# Altium PCB PCB1.PcbDoc
Units mm, origin at the board's own origin, x right, y up, seen from the top; angles counter-clockwise.
Board outline 99.44 x 97.79 mm, 2 copper layers (Top Layer, Bottom Layer); 92 components, 54 nets, 232 pads, 32 vias.
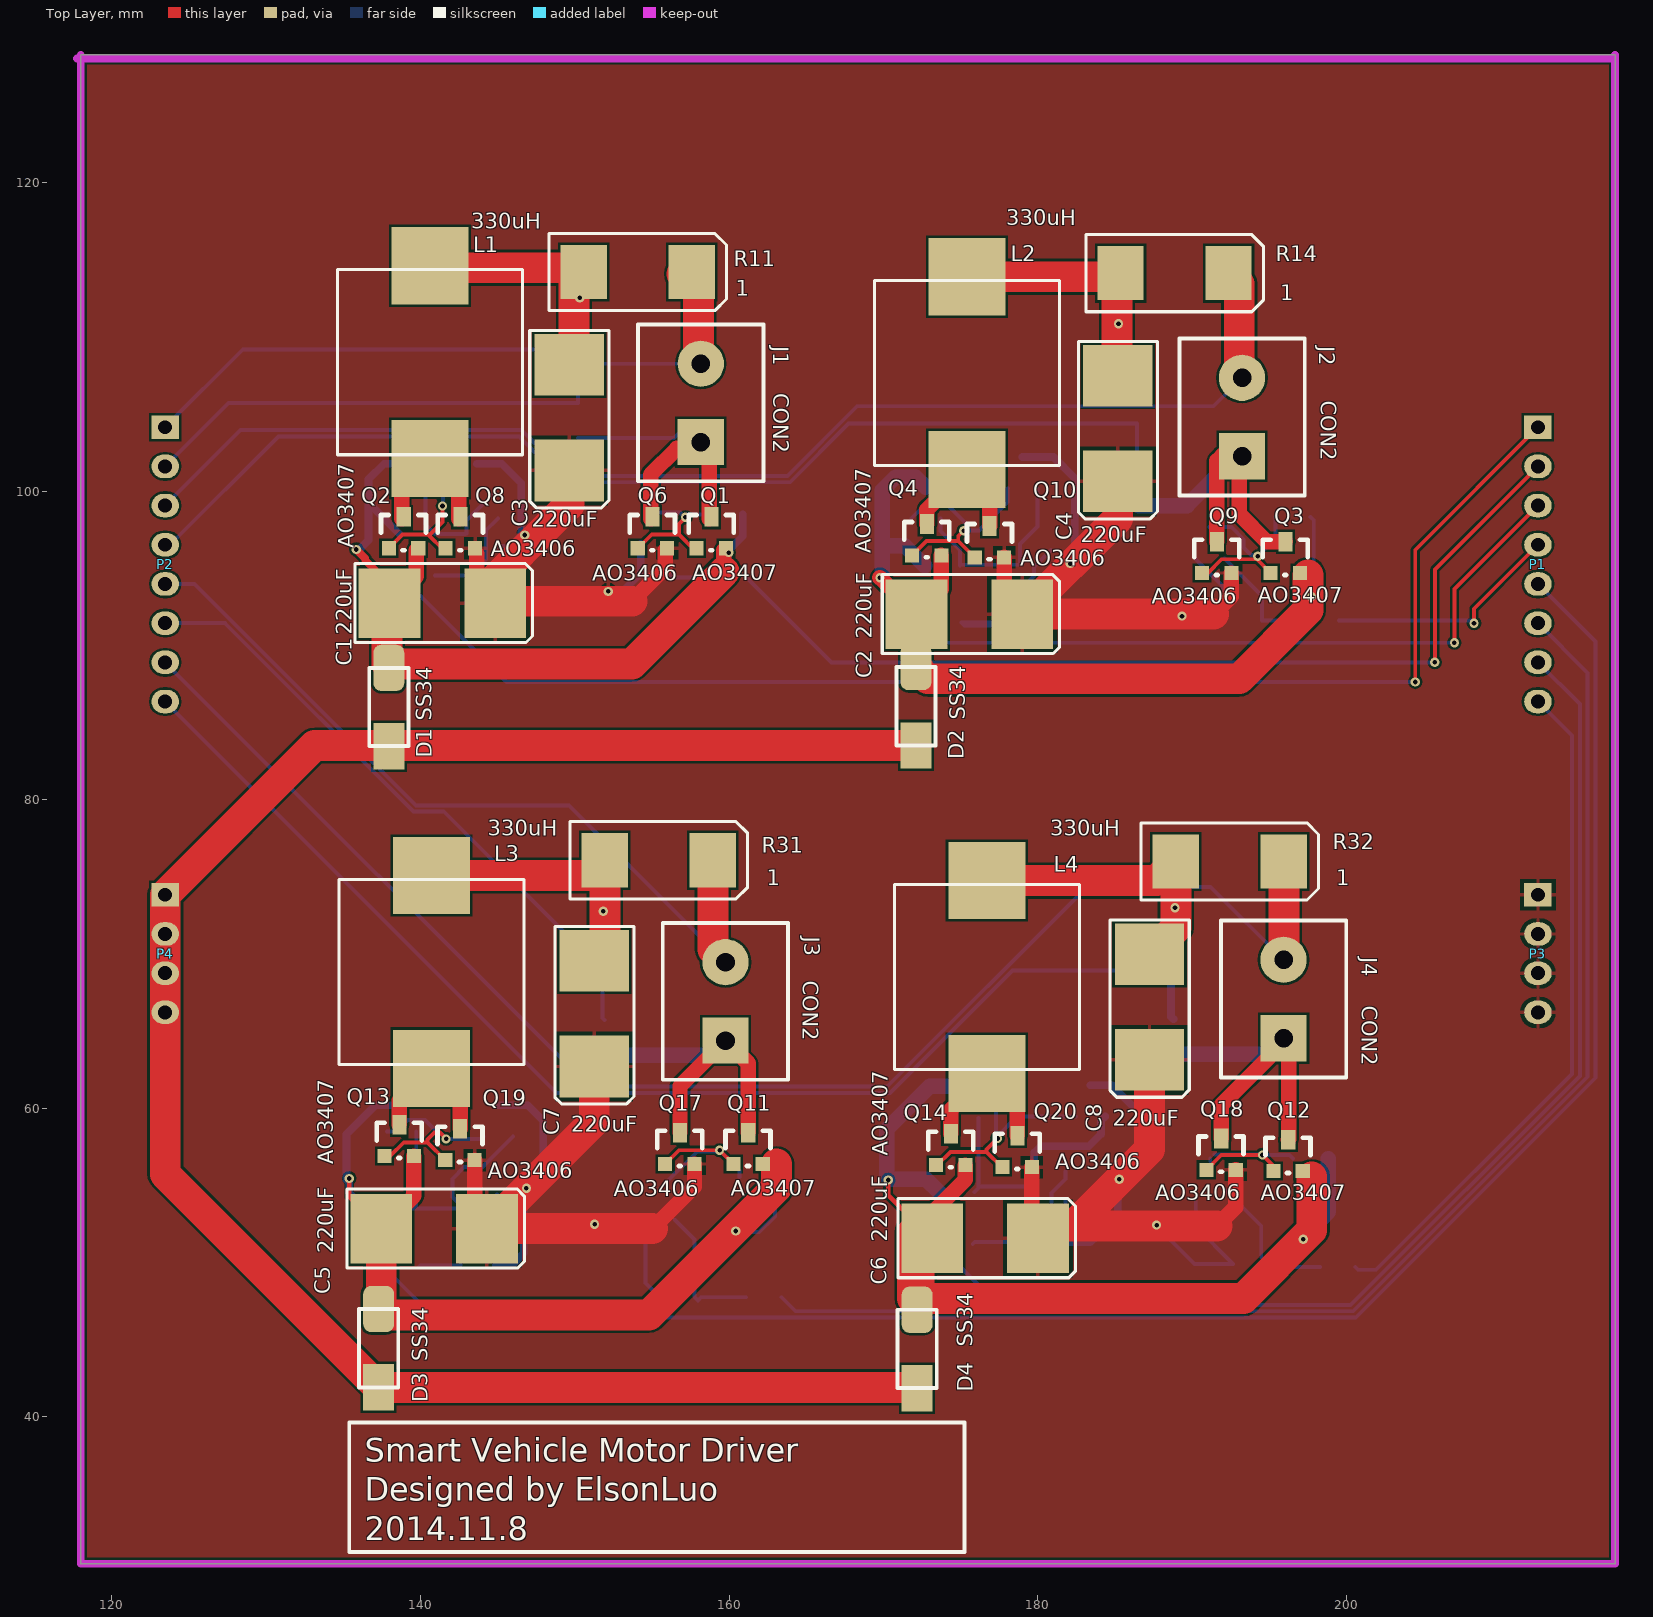
[diagram p0: Top Layer view]
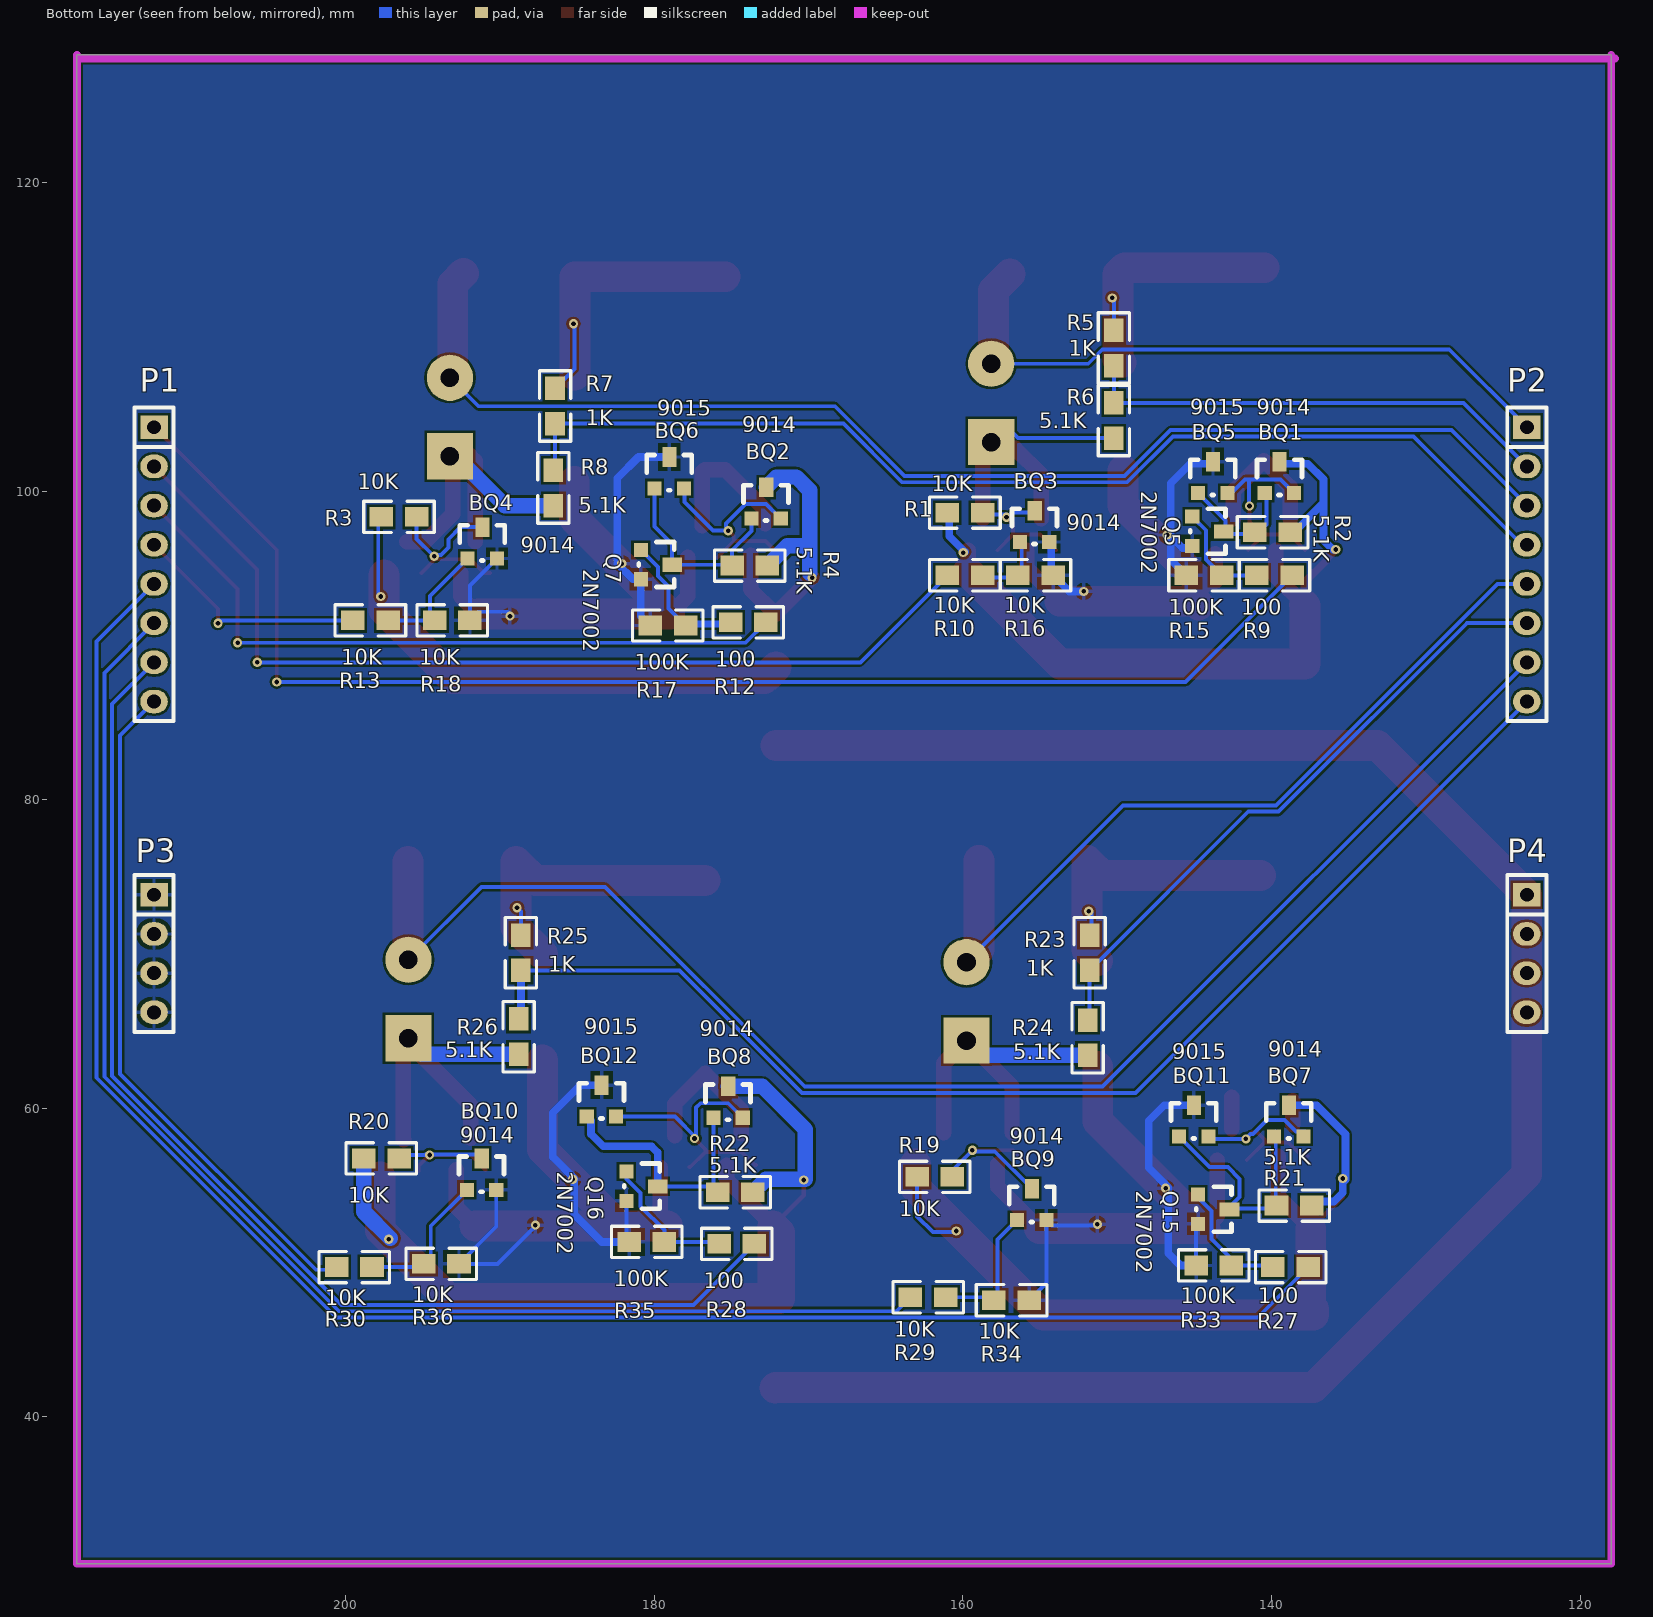
[diagram p1: Bottom Layer view, seen from below]
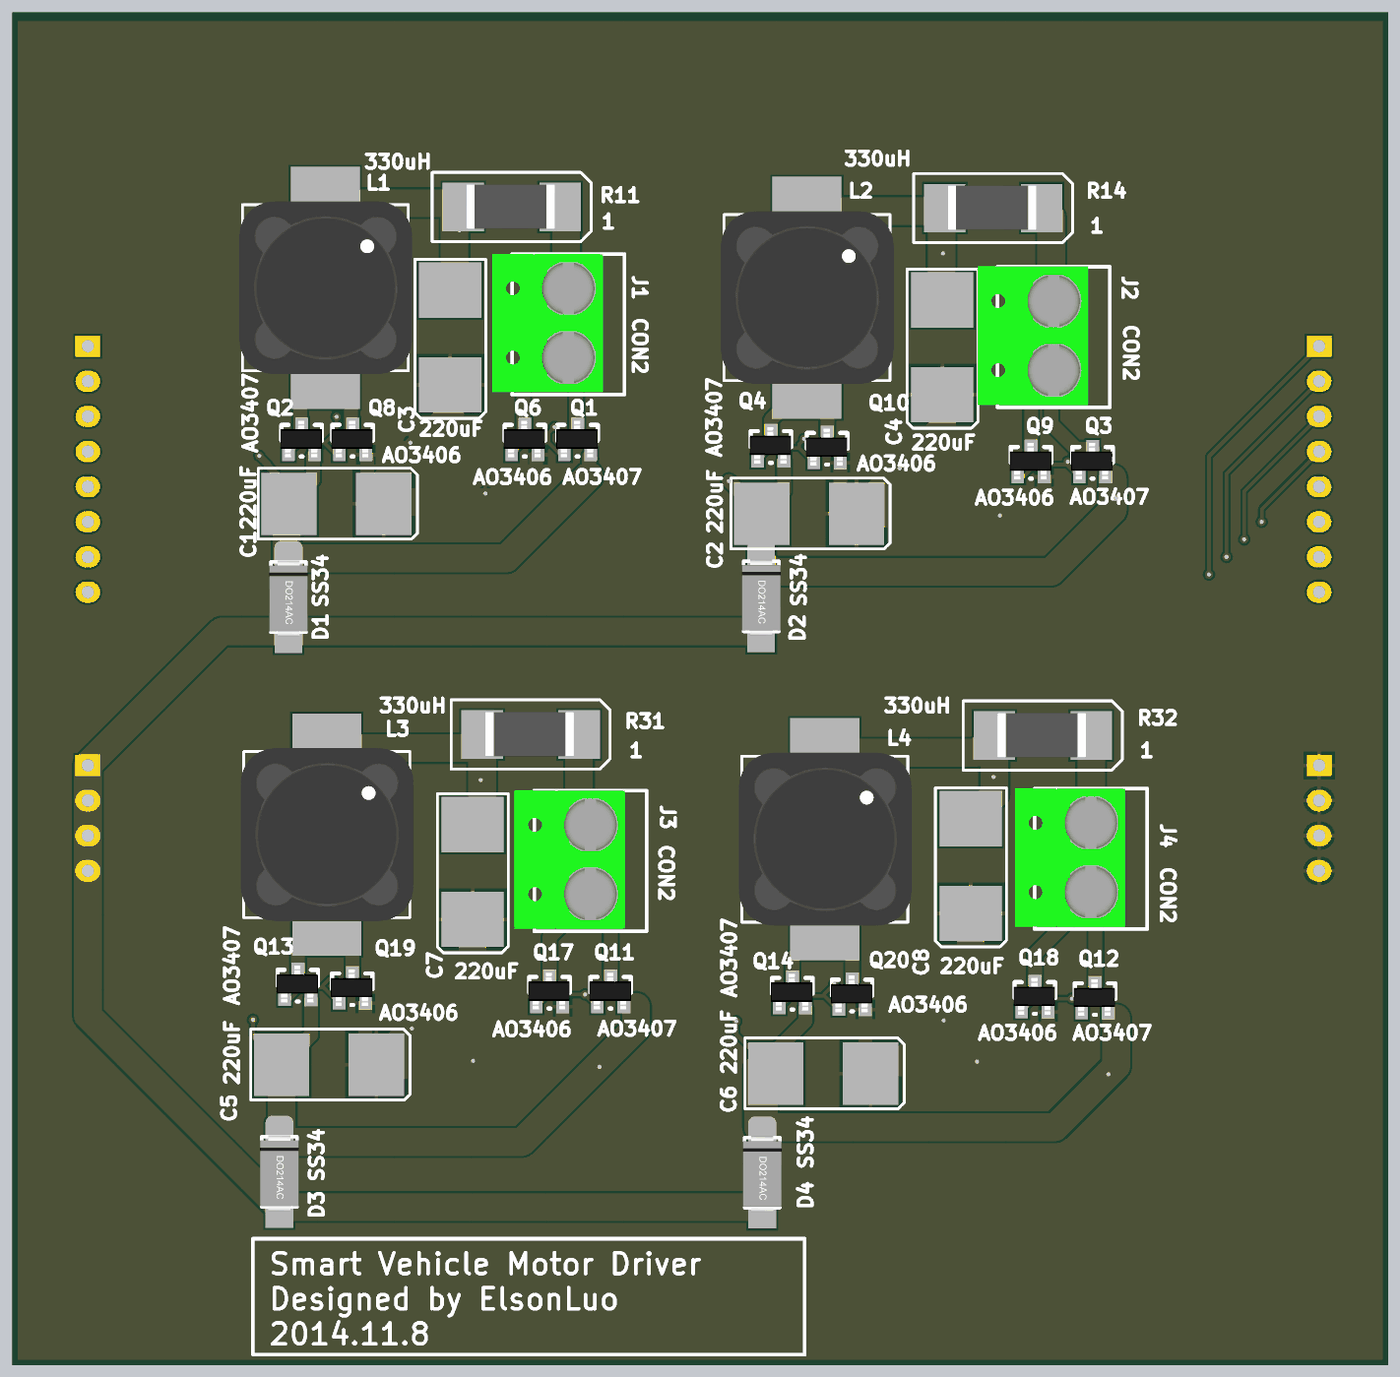
[diagram p2: 3D render of the assembled board from above, using the file's embedded part models]
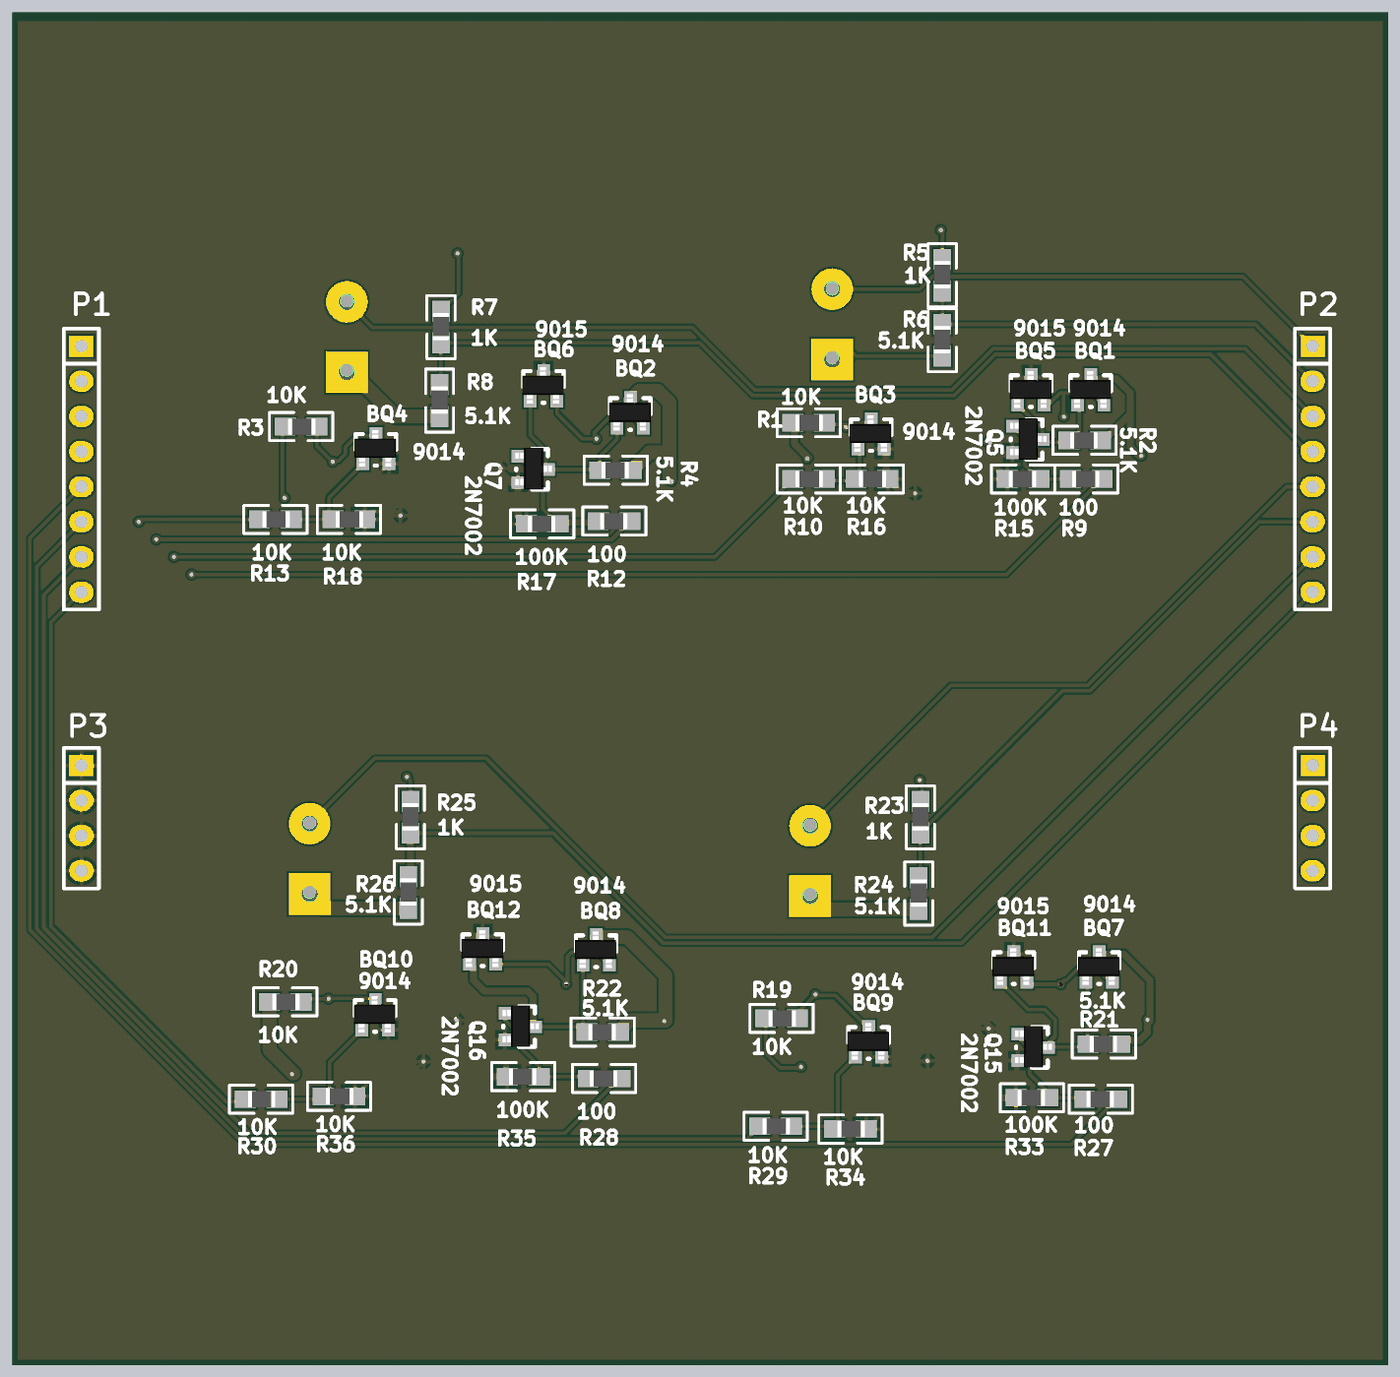
[diagram p3: 3D render of the assembled board from below, using the file's embedded part models]

## Layer stack, top to bottom
Top Solder: solder mask 0.0102, Solder Resist, Dk 3.5
Top Layer: signal copper 0.0356
Dielectric1: dielectric 0.32, FR-4, Dk 4.8
Bottom Layer: signal copper 0.0356
Bottom Solder: solder mask 0.0102, Solder Resist, Dk 3.5

## Board outline
117.983,30.48 217.424,30.48 217.424,128.27 117.983,128.27

## Design rules (kind name [scope] priority, off if disabled: settings)
Clearance [All] p1: gap=0.15
ComponentClearance [All] p1 off: gap=0.254 collisioncheckmode=3 verticalgap=0.254 showdistances=FALSE
PolygonConnect [All] p1: connectstyle=Relief reliefconductorwidth=0.254 reliefentries=4 polygonreliefangle="90 Angle" airgapwidth=0.254
RoomDefinition mcu [InComponentClass('mcu')] p1: confinementstyle=ConfineIn formatcopy=TRUE lockcomponents=FALSE outline 115.57,28.702 221.234,28.702 221.234,131.318 115.57,131.318
RoutingVias [All] p1: holewidth=0.3 width=0.6 viastyle="Through Hole" minholewidth=0.3 minwidth=0.6 maxholewidth=0.3 maxwidth=0.6
SMDNeckDown [All] p1 off: percent=80.000
SilkToSolderMaskClearance SilkscreenOverComponentPads [IsPad] p1: minsilkscreentomaskgap=0.254 clearancetoexposedcopper=TRUE
SolderMaskExpansion [All] p1: expansion=0.02
Width Width_2 [All] p1: maxlimit=2 minlimit=0.254 preferedwidth=0.254
Width Width_1 [All] p2: maxlimit=2 minlimit=0.254 preferedwidth=0.254 toplayer_maxwidth=1 minimp=50.000000 maximp=50.000000 favimp=50.000000
Width [All] p3: maxlimit=5 minlimit=0.15 preferedwidth=0.15
27 further rules are at their usual default settings.

## Components (designator, comment, footprint, x,y, rotation, side; value= is the part's Value field where it differs from the comment)
BQ1 "9014" SOT-23 139.421,101.905 r180 bottom
BQ2 "9014" SOT-23 172.695,100.254 r180 bottom
BQ3 "9014" SOT-23 155.296,98.73 r180 bottom (schematic designator BQ2)
BQ4 "9014" SOT-23 191.084,97.663 r180 bottom
BQ5 "9015" SOT-23 143.739,101.905 r180 bottom (schematic designator BQ3)
BQ6 "9015" SOT-23 178.968,102.21 r180 bottom
BQ7 "9014" SOT-23 138.811,60.198 r180 bottom
BQ8 "9014" SOT-23 175.158,61.417 r180 bottom
BQ9 "9014" SOT-23 155.473,54.788 r180 bottom
BQ10 "9014" SOT-23 191.135,56.744 r180 bottom
BQ11 "9015" SOT-23 144.983,60.198 r180 bottom
BQ12 "9015" SOT-23 183.363,61.493 r180 bottom
C1 "220uF" 7443 140.487,92.735 r0 top
C2 "220uF" 7443 174.65,92.024 r0 top
C3 "220uF" 7443 149.631,105.689 r270 top
C4 "220uF" 7443 185.191,104.978 r270 top
C5 "220uF" 7443 139.954,52.197 r0 top
C6 "220uF" 7443 175.666,51.562 r0 top
C7 "220uF" 7443 151.257,67.056 r270 top
C8 "220uF" 7443 187.249,67.488 r270 top
D1 "SS34" DO-241AC 137.947,86.004 r90 top
D2 "SS34" DO-241AC 172.11,86.055 r90 top
D3 "SS34" DO-241AC 137.287,44.45 r90 top
D4 "SS34" DO-241AC 172.187,44.399 r90 top
J1 "CON2" con2 158.166,105.715 r90 top
J2 "CON2" con2 193.243,104.8 r90 top
J3 "CON2" con2 159.766,66.929 r90 top
J4 "CON2" con2 195.936,67.081 r90 top
L1 "330uH" 12x12 140.614,108.356 r270 top
L2 "330uH" 12x12 175.412,107.645 r270 top
L3 "330uH" 12x12 140.716,68.834 r270 top
L4 "330uH" 12x12 176.708,68.504 r270 top
P1 "Header 8" "sip8 N" 212.425,104.14 r90 top
P2 "Header 8" "sip8 N" 123.45,104.14 r90 top
P3 "Header 4" "sip4 N" 212.425,70.025 r90 top
P4 "Header 4" "sip4 N" 123.45,70.025 r90 top
Q1 "AO3407" sot-23 158.902,98.323 r0 top
Q2 "AO3407" sot-23 138.963,98.323 r0 top
Q3 "AO3407" sot-23 196.113,96.723 r0 top
Q4 "AO3407" sot-23 172.872,97.866 r0 top
Q5 "2N7002" sot-23 143.104,97.333 r270 bottom (schematic designator Q3)
Q6 "AO3406" sot-23 155.092,98.323 r0 top (schematic designator Q4)
Q7 "2N7002" sot-23 178.841,95.174 r270 bottom
Q8 "AO3406" sot-23 142.646,98.323 r0 top (schematic designator Q5)
Q9 "AO3406" sot-23 191.668,96.723 r0 top
Q10 "AO3406" sot-23 176.936,97.739 r0 top
Q11 "AO3407" sot-23 161.29,58.42 r0 top
Q12 "AO3407" sot-23 196.291,57.963 r0 top
Q13 "AO3407" sot-23 138.684,58.928 r0 top
Q14 "AO3407" sot-23 174.422,58.344 r0 top
Q15 "2N7002" sot-23 142.723,53.391 r270 bottom
Q16 "2N7002" sot-23 179.781,54.889 r270 bottom
Q17 "AO3406" sot-23 156.87,58.42 r0 top
Q18 "AO3406" sot-23 191.948,58.039 r0 top
Q19 "AO3406" sot-23 142.621,58.674 r0 top
Q20 "AO3406" sot-23 178.74,58.217 r0 top
R1 "10K" 0805 158.725,98.603 r0 bottom
R2 "5.1K" 0805 141.072,97.333 r180 bottom
R3 "10K" 0805 195.402,98.323 r0 bottom
R4 "5.1K" 0805 174.955,95.174 r180 bottom
R5 "1K" 0805 150.216,110.414 r270 bottom (schematic designator R3)
R6 "5.1K" 0805 150.216,105.715 r270 bottom (schematic designator R4)
R7 "1K" 0805 186.436,106.655 r270 bottom
R8 "5.1K" 0805 186.538,101.346 r270 bottom
R9 "100" 0805 140.945,94.539 r180 bottom (schematic designator R5)
R10 "10K" 0805 158.725,94.539 r0 bottom (schematic designator R6)
R11 "1" 2512 154.076,114.198 r0 top (schematic designator R7)
R12 "100" 0805 175.057,91.491 r180 bottom
R13 "10K" 0805 197.256,91.618 r0 bottom
R14 "1" 2512 188.874,114.122 r0 top
R15 "100K" 0805 145.517,94.539 r180 bottom (schematic designator R8)
R16 "10K" 0805 154.153,94.539 r0 bottom (schematic designator R9)
R17 "100K" 0805 180.264,91.288 r180 bottom
R18 "10K" 0805 191.948,91.618 r0 bottom
R19 "10K" 0805 160.68,55.55 r0 bottom
R20 "10K" 0805 196.545,56.744 r0 bottom
R21 "5.1K" 0805 139.675,53.696 r180 bottom
R22 "5.1K" 0805 175.895,54.559 r180 bottom
R23 "1K" 0805 151.79,71.222 r270 bottom
R24 "5.1K" 0805 151.917,65.71 r270 bottom
R25 "1K" 0805 188.646,71.222 r270 bottom
R26 "5.1K" 0805 188.798,65.786 r270 bottom
R27 "100" 0805 139.903,49.708 r180 bottom
R28 "100" 0805 175.793,51.206 r180 bottom
R29 "10K" 0805 161.112,47.752 r0 bottom
R30 "10K" 0805 198.298,49.708 r0 bottom
R31 "1" 2512 155.448,76.073 r0 top
R32 "1" 2512 192.456,75.997 r0 top
R33 "100K" 0805 144.882,49.809 r180 bottom
R34 "10K" 0805 155.702,47.549 r0 bottom
R35 "100K" 0805 181.635,51.333 r180 bottom
R36 "10K" 0805 192.659,49.911 r0 bottom

## Footprints (in the part's own frame and the unit in brackets; to place one, negate y for a bottom-side part, rotate by r counter-clockwise, add the part's x,y. Pads: shape width x height; smd on the part's side, far side on the other; paste and mask are expansions set on the pad)
12x12 [mm]
  rect 5x5 smd: 1(-6.25,0) 2(6.25,0)
  silkscreen extent -6,-6 6,6, body extent -6.25,-6.22 6.25,6.28, height 6.7
0805 [mil]
  rect 60x50 smd: 1(0,0) 2(90,0)
  silkscreen extent -45,-40 135,40, body extent 4,-24 83,24, height 20
2512 [mm]
  rect 3x3.5 smd: 1(-3.5,0) 2(3.5,0)
  silkscreen extent -5.75,-2.5 5.75,2.5, body extent -3.27,-1.57 3.13,1.63, height 0.7
7443 [mm]
  rect 4x4.5 smd: 1(-2.5,0) 2(4.35,0)
  silkscreen extent -4.72,-2.55 6.78,2.58, body extent -2.52,-2.25 4.52,2.22, height 3
con2 [mm]
  rect 3x3 hole 1.2: 1(-2.54,0)
  round 3 hole 1.2: 2(2.54,0)
  silkscreen extent -5.08,-4.06 5.08,4.06, body extent -4.9,-2.5 5.1,5.5, height 11
DO-241AC [mm]
  rect 3x2 smd: 1(-2.54,0)
  rrect50% 3x2 smd: 2(2.54,0)
  silkscreen extent -2.54,-1.27 2.54,1.27, body extent -2.84,-1.4 2.64,1.4, height 2.24
"sip4 N" [mil]
  rect 60x70 hole 35.43: 1(150,0)
  oval 60x70 hole 35.43: 2(50,0) 3(-50,0) 4(-150,0)
  body extent -200,-50 200,50, height 331
"sip8 N" [mil]
  rect 60x70 hole 35.43: 1(0,0)
  oval 60x70 hole 35.43: 2(-100,0) 3(-200,0) 4(-300,0) 5(-400,0) 6(-500,0) 7(-600,0) 8(-700,0)
  body extent -750,-50 50,50, height 331
SOT-23 [mil]
  rect 36x36 smd: 1(-40,-80) 2(35,-80)
  rect 36x50 smd: 3(-2,0)
  silkscreen extent -60,-85 55,5, body extent -63,-87 55,17, height 43
sot-23 [mil]
  rect 36x36 smd: 1(-40,-80) 2(35,-80)
  rect 36x50 smd: 3(-2,0)
  silkscreen extent -60,-85 55,5, body extent -63,-87 55,17, height 43

## Part data
BQ1 BQ2 BQ3 BQ4 BQ5 BQ6 BQ7 BQ8 BQ9 BQ10 BQ11 BQ12: "transistor"
C1 C2 C3 C4 C5 C6 C7 C8: library part "Electrolytic CAP"
D1 D2 D3 D4: library part SS14, "Diode"
L1 L2 L3 L4: library part Inductance
P1 P2: "Header, 8-Pin"
P3 P4: "Header, 4-Pin"
R1 R2 R3 R4 R5 R6 R7 R8 R9 R10 R11 R12 R13 R14 R15 R16 R17 R18 R19 R20 R21 R22 R23 R24 R25 R26 R27 R28 R29 R30 R31 R32 R33 R34 R35 R36: library part RES, "RES"

## Via types
v1: diameter 0.6, hole 0.3, Top Layer to Bottom Layer, tented both sides, 32 vias

## Nets (pads, with @x,y where several pads share a name; then routed paths per layer and width w, separated by ;. In a path a pad name is that pad's centre, name@x,y a point inside that pad or via, vN(x,y) a via of type N, cw(c..) or ccw(c..) an arc to the next point about the centre after c; other vN are vias at no path point)
GND: BQ3.2 BQ4.2 BQ5.3 BQ6.3 BQ9.2 BQ10.2 BQ11.3 BQ12.3 C1.2 C2.2 C3.2 C4.2 C5.2 C6.2 C7.2 C8.2 P3.1 P3.2 P3.3 P3.4 Q5.2 Q6.2 Q7.2 Q8.2 Q9.2 Q10.2 Q15.2 Q16.2 Q17.2 Q18.2 Q19.2 Q20.2 R15.1 R16.1 R17.1 R18.1 R33.1 R34.1 R35.1 R36.1 | length 220.2
  Top Layer w0.5: C1.2@144.71,92.608 C1.2@144.71,94.164
  Top Layer w1: Q19.2 143.51,52.991 C5.2 ; Q8.2@143.63,95.942 143.63,94.164 C1.2@144.71,94.164 ; 153.695,92.862 155.854,95.021 Q6.2@155.854,96.164 ; 155.042,52.197 157.759,54.915 Q17.2 ; Q10.2 177.825,93.199 C2.2 ; C6.2@179.153,52.375 179.629,52.851 Q20.2 ; 191.414,92.024 192.557,93.167 Q9.2 ; 191.618,52.375 192.837,53.594 Q18.2
  Top Layer w2: C1.2@144.71,92.608 C1.2 144.964,92.862 153.695,92.862 ; C1.2@144.71,94.164 146.456,95.91 ; 146.431,95.936 149.606,99.111 ; 149.631,99.085 C3.2 ; C7.2 151.257,59.15 C5.2 155.042,52.197 ; C6.2@179.153,52.375 182.296,52.375 ; C4.2 185.191,98.215 C2.2 191.414,92.024 ; C8.2 187.249,57.328 182.296,52.375 ; 191.618,52.375 182.296,52.375
  Bottom Layer w0.254: R33.1 144.882,52.426 Q15.2@144.958,52.502 ; v1@151.105,52.4 154.229,52.4 BQ9.2 154.584,48.666 R34.1 ; R35.1 181.813,51.511 Q16.2 ; v1@187.604,52.476 190.17,49.911 R36.1 190.246,52.324 BQ10.2 ; 189.509,92.177 191.389,92.177 R18.1 191.948,93.878 BQ4.2
  Bottom Layer w0.5: BQ5.3@143.662,101.778 145.263,101.778 146.533,100.508 v1@146.533,97.206 ; R33.1 145.898,49.809 146.685,50.597 146.685,54.864 147.955,56.134 147.955,59.182 146.939,60.198 BQ11.3 ; Q5.2@145.009,96.317 145.771,96.317 146.533,97.079 146.533,95.555 R15.1 ; v1(152.171,93.497) 153.111,93.497 R16.1 154.28,94.666 BQ3.2@154.28,96.571 ; BQ6.3 181.026,102.21 182.397,100.838 182.397,95.301 181.381,94.285 Q7.2 180.873,91.897 R17.1 ; R35.1 183.413,51.333 185.191,53.111 185.191,55.448 186.588,56.845 186.588,59.715 184.81,61.493 BQ12.3
  other v1: 187.706,52.426 151.282,52.476 146.863,54.813 185.293,55.397 189.357,91.897 182.118,95.301 146.761,97.155
"M1 CUR": J1.2 P2.1 R11.2 | length 43.7
  Top Layer w2: R11.2@156.941,114.071 158.013,112.999 J1.2@158.013,107.975
  Bottom Layer w0.254: P2.1 128.477,109.167 150.965,109.167 151.877,108.255 J1.2
"M1 DIR": P1.2 R10.2 | length 62.5
  Top Layer w0.254: v1(205.74,88.9) 205.74,94.915 P1.2
  Bottom Layer w0.254: R10.2 166.649,88.9 v1(205.74,88.9)
"M1 PWM": P1.1 R9.2 | length 88.5
  Top Layer w0.254: v1(204.47,87.63) 204.47,96.185 P1.1
  Bottom Layer w0.254: R9.2 145.567,87.63 v1(204.47,87.63)
"M1 VOL": P2.2 R5.2 R6.1 | length 30.9
  Bottom Layer w0.254: P2.2 127.565,105.715 R6.1 R5.2
"M2 CUR": J2.2 P2.3 R14.2 | length 82.7
  Top Layer w2: R14.2 193.065,113.431 J2.2@193.065,107.391
  Bottom Layer w0.254: P2.3 128.34,103.95 146.55,103.95 149.525,100.975 163.775,100.975 168.3,105.5 191.403,105.5 J2.2
"M2 DIR": P1.4 R13.2 | length 15.5
  Top Layer w0.254: v1(208.28,91.44) 208.28,92.375 P1.4
  Bottom Layer w0.254: R13.2 v1@208.28,91.618
"M2 PWM": P1.3 R12.2 | length 45.9
  Top Layer w0.254: v1(207.01,90.17) 207.01,93.645 P1.3
  Bottom Layer w0.254: R12.2 174.092,90.17 v1(207.01,90.17)
"M2 VOL": P2.4 R7.2 R8.1 | length 71.8
  Bottom Layer w0.254: P2.4 123.774,96.52 130.8,103.546 146.383,103.546 149.358,100.571 163.942,100.571 167.74,104.369 R7.2 186.436,101.448 R8.1
"M3 CUR": J3.2 P2.5 R31.2 | length 53.4
  Top Layer w2: R31.2 158.948,70.287 J3.2
  Bottom Layer w0.254: P2.5 125.345,93.98 139.7,79.625 149.61,79.625 J3.2
"M3 DIR": P1.6 R29.2 | length 89.7
  Bottom Layer w0.254: R29.2 164.31,46.84 200.447,46.84 215.646,62.039 215.646,88.219 P1.6
"M3 PWM": P1.5 R27.2 | length 119.9
  Bottom Layer w0.254: R27.2 140.889,46.436 200.614,46.436 216.154,61.976 216.154,90.251 P1.5
"M3 VOL": P2.6 R23.2 R24.1 | length 40.9
  Bottom Layer w0.254: P2.6 127.314,91.44 139.533,79.221 141.505,79.221 R23.2 151.79,65.837 R24.1
"M4 CUR": J4.2 P2.7 R32.2 | length 97.7
  Top Layer w2: R32.2 195.956,69.957 J4.2@196.266,69.647
  Bottom Layer w0.254: P2.7 150.95,61.4 170.25,61.4 183.2,74.35 191.207,74.35 J4.2
"M4 DIR": P1.8 R30.2 | length 44.4
  Bottom Layer w0.254: R30.2 200.762,49.53 201.93,49.53 214.63,62.23 214.63,84.155 P1.8
"M4 PWM": P1.7 R28.2 | length 77.3
  Bottom Layer w0.254: R28.2 177.47,47.244 200.279,47.244 215.138,62.103 215.138,86.187 P1.7
"M4 VOL": P2.8 R25.2 R26.1 | length 82.2
  Bottom Layer w0.254: P2.8 148.814,60.996 170.417,60.996 178.357,68.936 R25.2
  Bottom Layer w0.5: R25.2 188.646,65.938 R26.1
NetBQ1_b: BQ1.1 BQ5.1 Q5.3 R2.1 | length 8
  Bottom Layer w0.254: BQ1.1@140.31,99.746 140.31,97.841 140.945,97.206 142.926,97.206 142.977,97.257 142.977,98.095 BQ5.1@144.628,99.746
NetBQ1_c: BQ1.3 C1.1 D1.2 Q1.2 Q2.2 R1.2 R2.2 | length 52.1
  Top Layer w0.5: v1(135.839,96.215) 136.423,95.631 136.423,95.529 137.86,94.092 C1.1@137.86,92.608
  Top Layer w1: C1.1@137.86,92.608 139.725,94.473 Q2.2@139.725,96.164 ; 159.664,94.767 Q1.2@159.664,96.164
  Top Layer w2: C1.1@137.86,92.608 137.82,92.568 137.82,88.798 153.695,88.798 159.664,94.767
  Bottom Layer w0.5: v1(135.839,96.215) 136.017,96.215 136.627,96.825 136.627,99.238 ; R2.2@138.659,97.206 136.627,99.238 ; BQ1.3@139.344,101.778 137.643,101.778 136.627,100.762 136.627,99.238 ; v1@159.868,96.063 160.884,97.079 R1.2@160.884,98.476
  other v1: 159.969,96.012
NetBQ1_e: BQ1.2 BQ5.2 Q2.1 Q8.1 | length 13.7
  Top Layer w0.254: Q2.1@137.82,96.164 138.836,97.18 140.487,97.18 ; v1(141.427,99.035) 141.427,97.993 140.614,97.18 140.487,97.18 ; Q8.1@141.503,96.164 140.487,97.18
  Bottom Layer w0.254: BQ1.2@138.405,99.746 139.421,100.762 141.453,100.762 ; v1@141.453,99.111 141.453,100.762 ; BQ5.2@142.723,99.746 141.707,100.762 141.453,100.762
NetBQ2_b: BQ2.1 BQ6.1 Q7.3 R4.1 | length 12.9
  Bottom Layer w0.254: BQ2.1 173.711,97.409 174.955,96.164 R4.1 175.006,95.225 Q7.3 178.841,96.571 179.984,97.714 BQ6.1
NetBQ2_c: BQ2.3 C2.1 D2.2 Q3.2 Q4.2 R3.2 R4.2 | length 54.5
  Top Layer w1: v1(169.774,94.386) 172.136,92.024 C2.1 173.761,93.635 Q4.2
  Top Layer w2: D2.2 172.872,87.833 193.065,87.833 197.51,92.278 197.51,94.564
  Bottom Layer w0.254: R3.2 197.891,98.12 197.891,93.32 v1(197.739,93.167)
  Bottom Layer w1: 169.926,94.666 169.926,100.051 170.79,100.914 172.085,100.914 BQ2.3 ; 170.51,96.469 171.374,96.469 R4.2
NetBQ2_e: BQ2.2 BQ6.2 Q4.1 Q10.1 | length 14.9
  Top Layer w0.254: Q4.1 172.796,96.774 174.854,96.774 ; v1(175.209,97.434) 174.854,97.079 174.854,96.774 ; Q10.1 174.854,96.774
  Bottom Layer w0.254: BQ2.2 172.754,99.17 174.092,99.17 175.362,97.9 175.362,97.714 ; v1(175.209,97.434) 176.2,97.434 178.054,99.289 178.054,100.152 BQ6.2
NetBQ3_b: BQ3.1 R10.1 R16.2 | length 4.5
  Bottom Layer w0.254: BQ3.1@156.185,96.571 156.185,94.539 156.312,94.412 R10.1@158.598,94.412
NetBQ3_c: BQ3.3 Q1.1 Q6.1 R1.1 | length 9.5
  Top Layer w0.254: Q6.1@153.949,96.164 153.972,96.164 154.988,97.18 156.743,97.18 ; v1(157.175,98.298) 156.743,97.866 156.743,97.18 ; Q1.1@157.759,96.164 156.743,97.18
  Bottom Layer w0.254: BQ3.3@155.219,98.603 156.82,98.603 157.074,98.349 157.201,98.476 R1.1@158.598,98.476
NetBQ4_b: BQ4.1 R13.1 R18.2 | length 7.7
  Bottom Layer w0.254: BQ4.1 194.539,93.193 194.539,91.618 R13.1
NetBQ4_c: BQ4.3 Q3.1 Q9.1 R3.1 | length 12.4
  Top Layer w0.254: Q9.1 191.033,94.691 191.922,95.58 194.208,95.58 Q3.1
  Bottom Layer w0.254: BQ4.3 192.557,97.663 193.345,96.876 193.345,96.342 193.827,95.86 194.361,95.86 195.402,96.901 R3.1
  other v1: 194.259,95.783
NetBQ7_b: BQ7.1 BQ11.1 Q15.3 R21.1 | length 15.1
  Bottom Layer w0.254: R21.1@139.268,53.492 Q15.3@142.265,53.492 ; R21.1 139.725,53.746 BQ7.1@139.725,58.496 ; Q15.3 142.723,53.594 142.062,54.254 142.062,55.423 142.824,56.185 144.018,56.185 BQ11.1
NetBQ7_c: BQ7.3 C5.1 D3.2 Q11.2 Q13.2 R19.2 R21.2 | length 62.6
  Top Layer w0.3: v1(135.382,55.448) 135.382,54.269 C5.1
  Top Layer w1: C5.1 139.573,54.316 Q13.2
  Top Layer w2: D3.2 137.287,46.609 154.813,46.609 163.068,54.864 163.068,56.388 ; D3.2@137.454,47.157 C5.1
  Bottom Layer w0.254: BQ7.3@138.546,60.528 BQ7.3@138.76,60.528 ; v1@160.249,51.968 161.95,51.968 162.966,52.984 R19.2
  Bottom Layer w0.5: v1@135.331,55.245 135.204,55.372 135.204,58.318 137.084,60.198 BQ7.3 ; v1(135.382,55.448) 135.382,54.534 135.966,53.95 137.135,53.95 R21.2
  other v1: 160.426,52.045
NetBQ7_e: BQ7.2 BQ11.2 Q13.1 Q19.1 | length 13.7
  Top Layer w0.254: Q13.1 138.024,56.896 138.913,57.785 140.462,57.785 ; Q19.1 140.462,57.785 ; v1(141.656,58.014) 141.249,58.42 140.919,58.42 140.462,57.963 140.462,57.785
  Bottom Layer w0.254: BQ7.2@137.82,58.496 138.419,58.496 139.153,59.23 140.297,59.23 141.209,58.318 141.351,58.318 v1(141.656,58.014) 143.942,58.014 BQ11.2
NetBQ8_b: BQ8.1 BQ12.1 Q16.3 R22.1 | length 16.8
  Bottom Layer w0.254: R22.1 R22.1@176.174,54.839 ; BQ8.1 R22.1@176.174,54.839 ; Q16.3 176.276,54.94 R22.1@176.174,54.839
  Bottom Layer w0.5: Q16.3 179.781,57.125 180.188,57.531 183.312,57.531 184.099,58.318 184.099,59.182 BQ12.1
NetBQ8_c: BQ8.3 C6.1 D4.2 Q12.2 Q14.2 R20.2 R22.2 | length 68.6
  Top Layer w0.3: v1(170.307,55.347) 170.307,54.371 C6.1@172.303,52.375
  Top Layer w1: C6.1@172.303,52.375 175.311,55.383 Q14.2
  Top Layer w2: D4.2@171.882,47.676 171.882,51.954 172.303,52.375 172.303,47.843 172.136,47.676 193.345,47.676 197.764,52.095 197.764,55.55
  Bottom Layer w1: R22.2 172.771,55.397 170.205,55.397 170.205,58.623 172.999,61.417 BQ8.3 ; v1@197.104,51.562 198.831,53.289 R20.2
  other v1: 197.206,51.511
NetBQ8_e: BQ8.2 BQ12.2 Q14.1 Q20.1 | length 17.5
  Top Layer w0.254: Q14.1 173.482,56.312 174.346,57.175 176.682,57.175 ; v1(177.394,58.039) 176.682,57.328 176.682,57.175 ; Q20.1 177.673,56.185 176.682,57.175
  Bottom Layer w0.254: BQ8.2 175.209,60.325 177.013,60.325 177.292,60.046 177.292,58.09 178.664,59.461 BQ12.2
NetBQ9_b: BQ9.1 R29.1 R34.2 | length 9
  Bottom Layer w0.254: BQ9.1 157.759,51.486 157.759,47.777 R34.2 158.191,47.752 R29.1
NetBQ9_c: BQ9.3 Q11.1 Q17.1 R19.1 | length 12.3
  Top Layer w0.254: Q17.1 156.743,57.277 v1(159.385,57.277) Q11.1
  Bottom Layer w0.254: BQ9.3 157.937,57.201 159.309,57.201 v1(159.385,57.277) 160.68,55.982 R19.1
NetBQ10_b: BQ10.1 R30.1 R36.2 | length 9.4
  Bottom Layer w0.254: BQ10.1 194.488,52.375 194.488,50.368 R36.2 195.148,49.708 R30.1
NetBQ10_c: BQ10.3 Q12.1 Q18.1 R20.1 | length 10.9
  Top Layer w0.254: Q18.1 191.897,56.972 v1(194.564,56.972) 195.275,56.261 Q12.1
  Bottom Layer w0.254: BQ10.3@191.186,56.591 BQ10.3 ; BQ10.3@191.465,56.998 v1@194.818,56.998 ; v1(194.564,56.972) 196.317,56.972 R20.1
NetC3_1: C3.1 L1.1 R5.1 R11.1 | length 17.6
  Top Layer w2: L1.1@140.487,114.479 149.533,114.479 149.941,114.071 149.941,108.499 C3.1@149.758,108.316
  Bottom Layer w0.254: R5.1 v1@150.216,112.573
  other v1: 150.317,112.522
NetC4_1: C4.1 L2.1 R7.1 R14.1 | length 20.8
  Top Layer w2: L2.1 185.147,113.895 C4.1@185.147,107.522
  Bottom Layer w0.254: v1@185.166,110.846 185.166,107.925 R7.1
  other v1: 185.242,110.846
NetC7_1: C7.1 L3.1 R23.1 R31.1 | length 20.4
  Top Layer w2: L3.1 150.959,75.084 R31.1 151.948,70.247 C7.1
  Bottom Layer w0.254: v1@151.663,72.695 151.663,71.145 151.79,71.018 R23.1
  other v1: 151.841,72.771
NetC8_1: C8.1 L4.1 R25.1 R32.1 | length 21.4
  Top Layer w2: L4.1 187.713,74.754 R32.1 188.956,71.695 C8.1
  Bottom Layer w0.254: R25.1 188.646,72.746 v1(188.9,73)
NetJ1_1: J1.1 Q1.3 Q6.3 R6.2 | length 18.9
  Top Layer w1: Q6.3@154.915,98.196 154.915,101.067 156.616,102.768 158.14,102.768 158.725,102.184 Q1.3@158.725,98.196
  Bottom Layer w0.254: R6.2 156.439,103.429 J1.1@157.074,104.064 ; J1.1@157.074,104.318 J1.1@157.201,104.191
NetJ2_1: J2.1 Q3.3 Q9.3 R8.2 | length 22.5
  Top Layer w1: Q9.3 191.618,101.956 191.948,102.286 191.948,102.311 193.065,102.311 193.065,98.501 194.843,96.723 Q3.3
  Bottom Layer w1: R8.2 189.687,99.06 J2.1@193.218,102.591
NetJ3_1: J3.1 Q11.3 Q17.3 R24.2 | length 21.8
  Top Layer w1: Q17.3 156.82,61.443 J3.1 161.239,62.916 Q11.3
  Bottom Layer w1: R24.2 158.699,63.424 J3.1@159.588,64.313
NetJ4_1: J4.1 Q12.3 Q18.3 R26.2 | length 22.8
  Top Layer w1: Q18.3 191.897,60.198 196.266,64.567 196.266,57.988 Q12.3
  Bottom Layer w1: R26.2 195.047,63.5 J4.1@196.164,64.618
NetL1_2: L1.2 Q2.3 Q8.3 | length 9.1
  Top Layer w1: Q2.3@138.786,98.196 138.786,100.278 140.487,101.979 142.469,99.998 Q8.3@142.469,98.196
NetL2_2: L2.2 Q4.3 Q10.3 | length 9.6
  Top Layer w1: Q4.3 172.822,98.804 L2.2 176.735,101.395 176.886,101.244 Q10.3
NetL3_2: L3.2 Q13.3 Q19.3 | length 3.6
  Top Layer w1: Q13.3 L3.2@138.633,60.501 ; Q19.3 L3.2@142.57,60.73
NetL4_2: L4.2 Q14.3 Q20.3 | length 9.7
  Top Layer w1: Q14.3 174.371,59.917 L4.2 178.689,60.273 Q20.3
NetQ5_1: Q5.1 R9.1 R15.2 | length 6.7
  Bottom Layer w0.254: R9.1 R15.2 144.247,95.555 144.247,97.46 Q5.1@145.009,98.222
NetQ7_1: Q7.1 R12.1 R17.2 | length 11.9
  Bottom Layer w0.254: R17.2 175.26,91.288 R12.1 178.181,91.491 179.07,92.38 179.07,93.807 179.753,94.49 179.753,95.07 Q7.1
NetQ15_1: Q15.1 R27.1 R33.2 | length 8.3
  Bottom Layer w0.254: R27.1 140.005,49.809 R33.2 142.596,50.241 143.891,51.537 143.891,53.34 Q15.1@144.958,54.407
NetQ16_1: Q16.1 R28.1 R35.2 | length 9.2
  Bottom Layer w0.254: R28.1 175.92,51.333 R35.2 179.349,52.095 180.899,53.645 180.899,54.508 181.813,55.423 Q16.1
VCC_12V: D1.1 D2.1 D3.1 D4.1 P4.1 P4.2 P4.3 P4.4 | length 125.2
  Top Layer w2: D2.1 133.13,83.515 P4.1 P4.2 P4.3 P4.4 123.45,55.747 D3.1 172.136,41.91 D4.1

## Polygon pours and split planes (outlines as drawn)
GND on Bottom Layer "Bottom Layer-No Net" (solid, pour order 2): 117.983,128.016 118.008,128.041 217.17,128.041 217.17,30.48 117.983,30.48
GND on Top Layer "Bottom Layer-No Net" (solid, pour order 2): 117.983,128.016 118.008,128.041 217.17,128.041 217.17,30.48 117.983,30.48

## Keep-outs
Keep-Out Layer:
  lines w0.5: 117.729,128.041 217.17,128.041 ; 117.983,128.27 117.983,30.48 217.424,30.48 217.424,128.27

## Silkscreen, mask and mechanical layers (free items; w line width, h text height)
Top Overlay:
  lines w0.254: 135.382,31.242 135.382,39.624 175.26,39.624 175.26,31.242 135.382,31.242
  text "Smart Vehicle Motor Driver" at 136.398,37.084 h1.52
  text "Designed by ElsonLuo" at 136.398,34.544 h1.52
  text "2014.11.8" at 136.398,32.004 h1.52